# Allegro board PRISON_GOD_SCH_V200.brd
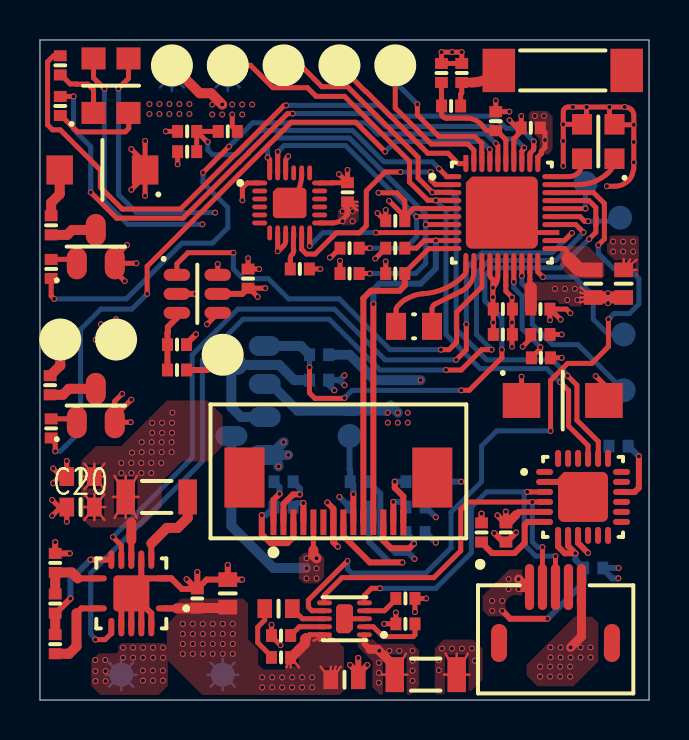
[diagram p0: board, top side]
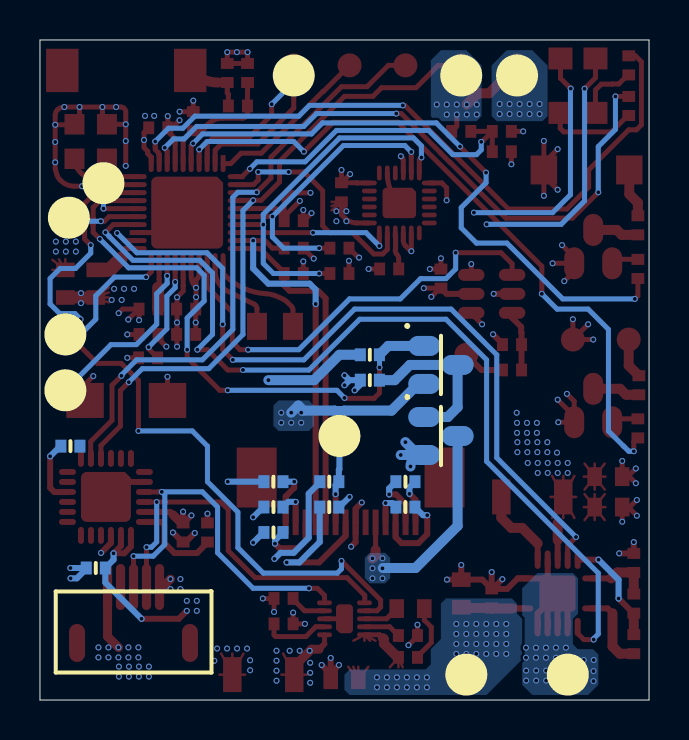
[diagram p1: board, bottom side, seen from below]

Outline 30.48 x 33.02 mm; copper layers: TOP, POWER SOURCE, GND, BOTTOM. Coordinates in mm from the lower left corner of the outline.
Outline path: 0,33.02 30.48,33.02 30.48,0 0,0 0,33.02

## Design rules (mm)
constraint set DEFAULT: min track width 0.127

## Placement (name value [footprint] x y rotation side)
ANT  ANTENNA  [ANT700X200-2N]  26.16 31.5 0 top
BAT+  BAT+  [TESTPOINT120]  9.14 1.27 180 bottom
BAT-  BAT-  [TESTPOINT120]  4.06 1.27 180 bottom
C1  100n  [RESC_0402]  7.37 28.45 0 top
C2  2.2p  [RESC_0402]  20.57 29.72 180 top
C3  100n  [RESC_0402]  24.56 28.63 180 top
C4  1.0u  [RESC_0603]  29.21 20.83 90 top
C5  1.0u  [RESC_0402]  25.04 19.56 180 top
C6  100n  [RESC_0402]  25.04 18.29 0 top
C7  1.0u  [RESC_0402]  23.16 19.56 0 top
C8  100n  [RESC_0402]  23.16 18.29 0 top
C9  100n  [RESC_0402]  17.78 23.98 180 top
C10  0-75p  [RESC_0402]  6.86 17.78 0 top
C11  100n  [RESC_0402]  10.41 21.08 270 top
C12  1u  [RESC_0402]  12.19 10.92 180 bottom
C13  4.7u  [RESC_0402]  18.8 10.92 180 bottom
C14  1u  [RESC_0402]  12.19 9.65 180 bottom
C15  2.2u  [RESC_0402]  18.8 9.65 180 bottom
C16  4.7u  [RESC_0402]  16 9.65 180 bottom
C17  1u  [RESC_0603]  15.24 1.02 0 top
C18  4.7u  [RESC_0603]  9.4 5.33 90 top
C19  0.1u  [RESC_0402]  7.87 5.08 90 top
C20  10u  [RESC_0603]  2.03 9.65 0 top
C21  10u  [RESC_0603]  2.03 11.18 0 top
C22  100n  [RESC_0402]  13 21.56 0 top
C23  10UF  [RESC_1206]  19.3 1.27 180 top
C24  4.7u  [RESC_0402]  28.96 12.7 0 bottom
C25  100n  [RESC_0402]  23.32 8.38 90 top
C26  100n  [RESC_0402]  22.1 8.38 270 top
C27  1.0u  [RESC_0402]  27.69 6.6 180 bottom
C28  100n  [RESC_0402]  15.39 25.4 270 top
CHR_LED  LED  [RESC_0603]  11.94 4.57 180 top
DA_RES  BUTTON  [BUTTON300X400X200-2N]  26.16 14.99 0 top
INTA  INTA  [TESTPOINT120]  29.21 15.49 180 bottom
INTB  INTB  [TESTPOINT120]  29.21 18.29 180 bottom
INTC  INTC  [TESTPOINT120]  17.78 31.75 0 top
INTD  INTD  [TESTPOINT120]  14.99 31.75 0 top
J_GND  GND  [TESTPOINT120]  9.4 31.24 180 bottom
J_VCC  J_VCC  [TESTPOINT120]  6.6 31.24 180 bottom
L1  DNP  [RESC_0402]  21.11 31.37 90 top
L2  7.5n  [RESC_0402]  20.09 31.37 90 top
L3  3.9n  [RESC_0402]  22.81 28.96 90 top
L4  2.2u  [RESC_0603]  27.69 20.83 270 top
L5  4.7u  [RESC_1206]  5.84 10.16 180 top
LED  RED_GREEN  [RGB_COM_A_3528-4N]  3.56 30.73 90 top
PAD  PAD  [TESTPOINT120]  9.14 17.27 0 top
Q1  SI2302DS  [SOT95P237X112-3N]  2.79 22.68 90 top
Q2  SI2302DS  [SOT95P237X112-3N]  2.79 14.73 90 top
Q3  Si2301BDS  [SOT95P237X112-3N]  10.41 13.21 180 bottom
Q4  SI2302DS  [SOT95P237X112-3N]  10.41 16.76 180 bottom
R1  10k  [RESC_0402]  9.4 28.45 0 top
R2  10k  [RESC_0402]  7.37 27.43 0 top
R3  10k  [RESC_0402]  17.78 21.34 180 top
R4  10k  [RESC_0402]  17.78 22.61 180 top
R5  10k  [RESC_0402]  15.49 22.61 0 top
R6  10k  [RESC_0402]  15.49 21.34 0 top
R7  10k  [RESC_0402]  25.07 17.12 0 top
R8  100  [RESC_0402]  0.56 23.75 270 top
R9  100  [RESC_0402]  0.51 15.75 270 top
R10  100  [RESC_0402]  1.02 31.75 90 top
R11  100  [RESC_0402]  1.02 29.72 90 top
R12  100  [RESC_0402]  0.56 21.56 90 top
R13  100  [RESC_0402]  0.56 13.59 90 top
R14  1-10k  [RESC_0402]  6.86 16.51 180 top
R15  47k  [RESC_0402]  13.97 16 180 bottom
R16  47k  [RESC_0402]  13.97 17.27 180 bottom
R17  10k  [RESC_0402]  16 10.92 180 bottom
R18  560k  [RESC_0402]  18.8 8.38 180 bottom
R19  500  [RESC_0402]  18.29 3.81 0 top
R20  250  [RESC_0402]  18.29 5.08 0 top
R21  10k  [RESC_0402]  12.06 3.23 180 top
R22  1.5k  [RESC_0402]  12.06 2.13 0 top
R23  158k  [RESC_0402]  0.76 2.79 90 top
R24  90k  [RESC_0402]  0.76 6.86 90 top
R25  15k  [RESC_0402]  0.76 4.83 90 top
RES  RES  [TESTPOINT120]  15.49 13.21 180 bottom
RXD  RX  [TESTPOINT120]  9.4 31.75 0 top
SOUNDER  R  [DET402_450X300-2N]  3.12 26.52 180 top
SWCLK  SWCLK  [TESTPOINT120]  27.3 25.86 180 bottom
SWDIO  SWDIO  [TESTPOINT120]  29.03 24.13 180 bottom
TXD  TX  [TESTPOINT120]  12.19 31.75 0 top
U1  DA14583_QFN40  [QFN40P500X500X80-41N]  23.11 24.38 0 top
U2  ASC0111B  [SOT95P237X292-6N]  7.87 20.32 0 top
U3  OLED_DIS_64_32  [FPC14N_1280X670X200-16N]  11.68 8.89 180 top
U4  BQ24050  [SON40P200X200X80-11N]  15.24 4.06 180 top
U5  TPS62736_PVQFN14  [QFN14P350X350X80-15N]  4.57 5.33 180 top
U6  MPU9250  [QFN24P300X300X100-25N]  12.5 24.87 0 top
U7  CP2104_QFN24  [QFN24P400X400X80-25N]  27.18 10.16 0 top
U_GND  GND  [TESTPOINT120]  6.6 31.75 0 top
USB  MICRO USB  [MICROUSB]  22.1 0.25 0 top
VM+  VM+  [TESTPOINT120]  3.81 18.03 0 top
VM-  VM-  [TESTPOINT120]  1.02 18.03 0 top
VPP  VPP  [TESTPOINT120]  17.78 31.24 180 bottom
Y1  16MHZ  [OSCCC200X250X90-4N]  27.94 27.94 180 top
Y2  32KHZ  [OSCCC200X120X60-2N]  18.72 18.69 0 top

## Library data of the parts
ANT = ANTENNA_0
BAT+ BAT- INTA INTB INTC INTD J_GND J_VCC PAD RES RXD SWCLK SWDIO TXD U_GND VM+ VM- VPP = TEST POINT
C1-C22 C24-C28 = CAP NP
C23 = CAP
CHR_LED = LED
DA_RES = SW PUSHBUTTON
L1-L5 = INDUCTOR
LED = LED BI-COLOUR_0
Q1 Q2 Q4 = MOSFET_I_EN_GSD: room: motor
Q3 = Si2301BDS_0
R1-R25 SOUNDER = R
U1 = DA14583_QFN40
U2 = ASC0111B_0
U3 = OLED_DIS_64_0
U4 = BQ24050
U5 = TPS62736_PVQFN14_2
U6 = MPU9250_1
U7 = CP2104_QFN24_0
USB = MICROUSB_1
Y1 = CRYSTAL14
Y2 = CRYSTAL

## Footprints (pads in the part's own frame, mm; a bottom-side part is the same pattern mirrored in y, then rotated)
ANT700X200-2N
  rect 1.625x2.17 smd: 1(-3.2,0) 2(3.2,0)
BUTTON300X400X200-2N
  rect 1.875x1.75 smd: 1(-2.062,0) 2(2.062,0)
DET402_450X300-2N
  rect 1.325x1.45 smd: 1(-2.138,0) 2(2.138,0)
FPC14N_1280X670X200-16N
  rect 0.3x1.28 smd: 1(0,0) 2(-0.5,0) 3(-1,0) 4(-1.5,0) 5(-2,0) 6(-2.5,0) 7(-3,0) 8(-3.5,0) 9(-4,0) 10(-4.5,0) 11(-5,0) 12(-5.5,0) 13(-6,0) 14(-6.5,0)
  rect 2x3 smd: M1(-7.95,-2.24) M2(1.45,-2.24)
MICROUSB
  round 0 hole 0.6: (1.7,4.5) (5.7,4.5)
  oval 0.46x2.3 smd: 1(2.4,5.4) 2(3.05,5.4) 3(3.7,5.4) 4(4.35,5.4) 5(5,5.4)
  oval 1.9x0.8 smd rot 89.7: 6(6.525,2.6) 7(0.875,2.6)
OSCCC200X120X60-2N
  rect 1x1.35 smd: 1(-0.9,0) 2(0.9,0)
OSCCC200X250X90-4N
  rect 1x1.025 smd: 1(-0.812,0.863) 2(-0.812,-0.863) 3(0.812,-0.863) 4(0.812,0.863)
QFN14P350X350X80-15N
  oval 0.925x0.3 smd: 1(-1.688,0.75) 7(1.688,0.75) 8(1.688,-0.75) 14(-1.688,-0.75)
  oval 0.3x0.925 smd: 2(-1,1.688) 3(-0.5,1.688) 4(0,1.688) 5(0.5,1.688) 6(1,1.688) 9(1,-1.688) 10(0.5,-1.688) 11(0,-1.688) 12(-0.5,-1.688) 13(-1,-1.688)
  custom 1.8x1.8 smd: 15(0,0)
QFN24P300X300X100-25N
  oval 0.75x0.238 smd: 1(-1.5,1) 2(-1.5,0.6) 3(-1.5,0.2) 4(-1.5,-0.2) 5(-1.5,-0.6) 6(-1.5,-1) 13(1.5,-1) 14(1.5,-0.6) 15(1.5,-0.2) 16(1.5,0.2) 17(1.5,0.6) 18(1.5,1)
  oval 0.238x0.75 smd: 7(-1,-1.5) 8(-0.6,-1.5) 9(-0.2,-1.5) 10(0.2,-1.5) 11(0.6,-1.5) 12(1,-1.5) 19(1,1.5) 20(0.6,1.5) 21(0.2,1.5) 22(-0.2,1.5) 23(-0.6,1.5) 24(-1,1.5)
  custom 1.68x1.52 smd: 25(0,0)
QFN24P400X400X80-25N
  oval 0.85x0.3 smd: 1(-1.925,1.25) 2(-1.925,0.75) 3(-1.925,0.25) 4(-1.925,-0.25) 5(-1.925,-0.75) 6(-1.925,-1.25) 13(1.925,-1.25) 14(1.925,-0.75) 15(1.925,-0.25) 16(1.925,0.25) 17(1.925,0.75) 18(1.925,1.25)
  oval 0.3x0.85 smd: 7(-1.25,-1.925) 8(-0.75,-1.925) 9(-0.25,-1.925) 10(0.25,-1.925) 11(0.75,-1.925) 12(1.25,-1.925) 19(1.25,1.925) 20(0.75,1.925) 21(0.25,1.925) 22(-0.25,1.925) 23(-0.75,1.925) 24(-1.25,1.925)
  custom 2.5x2.5 smd: 25(0,0)
QFN40P500X500X80-41N
  custom 0.85x0.25 smd: 1(-2.45,1.8) 2(-2.45,1.4) 3(-2.45,1) 4(-2.45,0.6) 5(-2.45,0.2) 6(-2.45,-0.2) 7(-2.45,-0.6) 8(-2.45,-1) 9(-2.45,-1.4) 10(-2.45,-1.8) 21(2.45,-1.8) 22(2.45,-1.4) 23(2.45,-1) 24(2.45,-0.6) 25(2.45,-0.2) 26(2.45,0.2) 27(2.45,0.6) 28(2.45,1) 29(2.45,1.4) 30(2.45,1.8)
  custom 0.25x0.85 smd: 11(-1.8,-2.45) 12(-1.4,-2.45) 13(-1,-2.45) 14(-0.6,-2.45) 15(-0.2,-2.45) 16(0.2,-2.45) 17(0.6,-2.45) 18(1,-2.45) 19(1.4,-2.45) 20(1.8,-2.45) 31(1.8,2.45) 32(1.4,2.45) 33(1,2.45) 34(0.6,2.45) 35(0.2,2.45) 36(-0.2,2.45) 37(-0.6,2.45) 38(-1,2.45) 39(-1.4,2.45) 40(-1.8,2.45)
  custom 3.6x3.6 smd: 41(0,0)
RESC_0402
  rect 0.55x0.64 smd: 1(-0.477,0) 2(0.477,0)
RESC_0603
  rect 0.73x0.94 smd: 1(-0.69,0) 2(0.69,0)
RESC_1206
  rect 0.925x1.75 smd: 1(-1.55,0) 2(1.55,0)
RGB_COM_A_3528-4N
  rect 1.1x1.2 smd: 1(-1.363,0.875) 2(-1.363,-0.875) 3(1.363,-0.875) 4(1.363,0.875)
SON40P200X200X80-11N
  oval 0.75x0.24 smd: 1(-1,0.8) 2(-1,0.4) 3(-1,0) 4(-1,-0.4) 5(-1,-0.8) 6(1,-0.8) 7(1,-0.4) 8(1,0) 9(1,0.4) 10(1,0.8)
  custom 0.85x1.45 smd: 11(0,0)
SOT95P237X112-3N
  oval 1.6x1 smd: 1(-0.835,0.95) 2(-0.835,-0.95) 3(0.835,0)
SOT95P237X292-6N
  oval 1.325x0.6 smd: 1(-1.022,0.95) 2(-1.022,0) 3(-1.022,-0.95) 4(1.022,-0.95) 5(1.022,0) 6(1.022,0.95)
TESTPOINT120
  round 1.2 smd: 1(0,0)

## Nets
GND: BAT-.1 C1.1 C3.2 C4.2 C5.1 C6.2 C7.2 C8.2 C9.2 C10.2 C11.1 C13.1 C15.1 C16.2 C17.2 C18.2 C19.2 C20.1 C21.1 C22.2 C23.1 C24.1 C25.1 C26.1 C27.1 C28.1 DA_RES.2 J_GND.1 L1.2 L2.2 L3.2 Q1.2(S) Q2.2(S) Q4.2(S) R1.2 R7.2 R16.1 R18.1 R19.1 R20.2 R21.2 R24.2 U1.16 U1.23 U1.34 U1.41 U2.2 U2.4 U2.6 U3.7(VSS) U4.3(VSS) U4.11 U5.2 U5.3 U5.4 U5.5 U5.12(VSS) U5.14 U5.15 U6.18 U6.20 U6.25 U7.2 U7.25 U_GND.1 USB.5 USB.6 USB.7 Y1.2 Y1.3
VBAT: BAT+.1 C17.1 C18.1 C19.1 J_VCC.1 Q3.2(S) R2.1 R15.1 R22.2 SOUNDER.1 U4.10 U5.1 VM+.1
VBAT_AD: C1.2 R1.1 R2.2 U1.1
VBUS: C23.2 C27.2 U4.1 U7.7 U7.8 USB.1(VBUS)
VCC_3V: C6.1 C7.1 C8.1 C9.1 C11.2 C16.1 C20.2 C21.2 C25.2 C28.2 DA_RES.1 L5.2 LED.3 LED.4 R3.2 R4.2 R5.1 R6.1 R17.1 U1.5 U1.14 U1.15 U2.5(VDD) U3.8 U5.11 U6.1 U6.8(VDDIO) U6.9 U6.13 U6.22 U7.5 U7.9
VIN_OK: U1.22 U5.10
VIN_OK_SET: U1.24 U5.6
CHR_SET: U1.28 U4.7
D+: U4.5 U7.3 USB.3
D-: U4.6 U7.4 USB.2
DA_RST: R7.1 U1.17
I2C_SCL_1: R4.1 U1.9 U3.11
I2C_SCL_2: R5.2 U1.6 U6.23
I2C_SDA_1: R3.1 U1.10 U3.10
I2C_SDA_2: R6.2 U1.7 U6.24
INTA: INTA.1 U1.18
INTB: INTB.1 U1.20
INTC: INTC.1 U1.39
INTD: INTD.1 U1.40
LED1: R10.2 U1.32
LED2: R11.2 U1.33
MOTOR: R13.1 U1.37
MPU_FSYNC: U1.2 U6.11
MPU_INT: U1.8 U6.12
OLED_RES: R17.2 RES.1 U3.9
OLED_VBAT: Q3.3 U3.5
OLED_VBAT_SW: Q4.1 R16.2 U1.27
SOUNDER: R12.1 U1.36
SWCLK: SWCLK.1 U1.26
SWDIO: SWDIO.1 U1.25
TOUCH: U1.13 U2.1
UART_RX: RXD.1 U1.4 U7.21
UART_TX: TXD.1 U1.3 U7.20
VDCDC: C3.1 C4.1 C5.2 L4.2 U1.19 U1.31
VPP: U1.38 VPP.1
N650552: C2.2 L2.1 L3.1 U1.35
N650846: L4.1 U1.21
N657737: U1.11 Y2.1
N657743: U1.12(XTAL32KP) Y2.2
N658494: U1.29 Y1.1
N680797: ANT.1 C2.1 L1.1
N748992: R19.2 U4.2
N749044: R20.1 U4.4
N749072: R21.1 U4.9
N749104: CHR_LED.1(CATHODE) U4.8
N749108: CHR_LED.2 R22.1
N749358: L5.1 U5.13
N749416: R24.1 R25.2 U5.8
N749488: R23.2 R25.1 U5.9
N750591: C22.1 U6.10
N751124: R8.1 SOUNDER.2
N751136: R9.1 VM-.1
N751236: Q1.3 R8.2
N751248: Q2.3 R9.2
N751256: Q1.1 R12.2
N751260: Q2.1 R13.2
N752175: C12.2 U3.1
N752329: Q3.1 Q4.3 R15.2
N752341: C12.1 U3.2
N752385: C14.2 U3.3
N752391: C14.1 U3.4
N752429: R18.2 U3.12
N752435: C15.2 U3.13
N752441: C13.2 U3.14
N753230: LED.1 R10.1
N753234: LED.2(YG_C) R11.1
N753932: C24.2 U7.16(VPP)
N754493: C10.1 R14.2 U2.3
N766501: PAD.1 R14.1
N768010: C26.2 U7.6
N788503: U1.30 Y1.4
N7492626: R23.1 U5.7

Pads without a net: ANT 2; U3 6 M1 M2; U6 2 3 4 5 6 7 14 15 16 17 19 21; U7 1 10 11 12 13 14 15 17 18 19 22 23 24; USB 4

## Via types
v1: diameter 0.3, hole 0.2, TOP to BOTTOM, 370 vias

## Routing (per net, layer and track width the routed paths; a pad name or vN(x,y) marks a point on that pad's centre or on a via; arc(x,y) is an arc through that point)
GND: length 267.8
  TOP w0.127: C23.1 20.85,2.32 ; C23.1 21.49,1.27 ; C23.1 21.41,2.32 ; C23.1 20.3,2.32 ; C23.1 20.21,1.27 ; C4.2 29.53,22.04 ; C4.2 29.86,22.02 ; C4.2 29.21,22.06 ; C4.2 29.86,21.52
  TOP w0.25: v1(17.22,3.81) R19.1 v1(17.81,4.37) ; Q1.2 3.74,22.15 v1(4.36,22.76) ; Q1.2 3.74,21.45 v1(4.24,20.95) ; Q1.2 v1(4.83,21.85) ; v1(28.5,29.67) 28.5,29.41 arc(28.56,29.08) Y1.2 28.81,28.78 v1(29.72,28.78) ; v1(28.5,29.67) v1(29.26,29.67) arc(29.45,29.63) 29.61,29.52 arc(29.69,29.4) 29.72,29.26 v1(29.72,28.78) ; v1(28.5,29.67) v1(27.36,29.67) ; v1(4.54,13.9) Q2.2 3.74,14.2 ; 24.08,28.45 24.05,28.45 v1(23.5,29.01) ; 24.08,28.45 C3.2 v1(24.08,29.21) ; 24.08,28.45 23.71,28.08 23.71,27.83 23.71,27.83 23.71,27.36 23.71,27.36 U1.34 ; C28.1 v1(15.39,26.52) ; C28.1 14.63,25.88 14.62,25.87 U6.18 ; C28.1 v1(14.96,26.31) ; U2.4 8.9,19.34 v1(8.36,18.8) ; v1(26.19,28.8) 26.19,29.42 arc(26.26,29.59) 26.44,29.67 v1(26.67,29.67) v1(27.36,29.67) ; v1(26.19,28.8) Y1.3 arc(27.3,29.06) 27.36,29.35 v1(27.36,29.67) ; v1(26.19,28.8) v1(26.19,27.97) v1(26.19,26.72) ; v1(1.34,8.92) C20.1 1.04,9.65 ; v1(29.72,28.78) v1(29.72,27.91) v1(29.72,26.9) 29.72,26.61 arc(29.72,26.57) 29.71,26.53 29.62,26.24 arc(29.57,26.14) 29.5,26.05 29.44,25.98 arc(29.13,25.78) 28.76,25.7 v1(28.37,25.7) ; U2.6 v1(8.9,21.81) ; v1(25.52,19) C5.1 25.54,19.56 ; U1.41 24.11,23.38 U1.23 ; v1(23.62,17.68) 23.62,18.27 C8.2 23.62,18.31 v1(23.62,18.89) 23.62,19.54 C7.2 23.62,19.58 v1(23.62,20.15) 23.31,20.45 23.31,20.75 23.31,20.75 23.31,21.08 23.31,21.08 23.31,21.22 arc(23.31,21.26) 23.31,21.3 U1.16 ; 3.74,14.2 v1(4.57,15.03) ; 3.74,14.2 3.74,14.95 v1(4.11,15.32) ; v1(26.54,19.35) 26.34,19.56 25.54,19.56 ; v1(10.41,22.1) C11.1 v1(10.97,21.56) ; C1.1 v1(6.3,28.45) ; v1(9.62,29.29) 9.62,28.7 R1.2 9.88,28.49 ; v1(0.66,10.85) 0.99,11.18 1.07,11.18 ; R7.2 v1(26.11,17.12) ; v1(19.33,5.08) R20.2 v1(18.77,4.41) ; 1.04,9.65 v1(0.61,9.22) ; 1.04,9.65 0.97,9.65 v1(0.61,10.01) ; U4.3 U4.11 ; 25.54,19.56 v1(26.06,19.03) ; v1(11.59,3.76) R21.2 11.59,3.2 v1(12.04,2.74) ; 1.07,11.18 C21.1 v1(1.34,11.96) ; 1.07,11.18 v1(0.66,11.58) ; C6.2 v1(26.11,18.29) ; U6.20 13.1,26.32 arc(12.94,25.53) U6.25 ; v1(27.81,16.21) 28.22,15.79 DA_RES.2 ; v1(14.03,21.56) C22.2 ; v1(16.89,24.36) 17.27,23.98 C9.2 v1(17.3,24.52) ; v1(22.81,29.99) L3.2 v1(23.49,29.43) ; v1(20.62,32.41) v1(21.11,32.41) L1.2 L2.2 v1(20.09,32.41) v1(20.62,32.41)
  TOP w0.3: U5.4 U5.15 ; U5.15 5.07,5.83 ; U5.15 4.07,4.83 U5.5 ; U5.15 5.07,4.83 ; C10.2 7.34,17.82 v1(7.81,18.3) ; U5.12 5.07,5.83 ; 5.07,5.83 5.32,6.08 U5.14 6.57,6.08 7.1,5.56 7.83,5.56 ; 7.83,5.56 v1(7.34,6.05) ; 7.83,5.56 C19.2 ; C26.1 v1(22.1,9.32) ; 15.93,1.34 v1(15.93,2.1) ; 15.93,1.34 v1(15.52,1.75) ; 15.93,1.34 15.93,1.3 ; v1(23.83,8.38) 23.35,7.9 C25.1 23.19,7.9 v1(22.73,8.36) ; C17.2 15.93,1.3 ; 15.93,1.3 v1(16.38,1.75) ; C18.2 8.34,6.02 C19.2 ; C18.2 v1(10.11,6.02) ; C18.2 v1(9.4,6.76) ; C19.2 v1(7.87,6.4) ; 5.07,4.83 5.57,4.33 U5.2 ; 5.07,4.83 U5.3 ; v1(0.76,7.9) R24.2 v1(1.49,7.34) ; v1(14.91,7.67) 14.68,7.9 U3.7 14.68,9.57 v1(14.38,9.88) ; U7.25 26.43,10.91 U7.2 ; U2.2 v1(7.77,20.32)
  TOP w0.45: USB.5 27.1,3.18 v1(26.55,2.63)
  TOP w0.5: U_GND.1 8,30.35 8.56,30.35 v1(9.12,29.79)
  GND w0.127: v1(0.66,10.85) 0.99,10.85 ; v1(0.66,10.85) 0.66,10.52 ; v1(0.66,10.85) 0.94,11.13 ; v1(0.66,10.85) 0.33,10.85 ; v1(0.66,10.85) 0.38,11.13 ; v1(0.66,10.85) 0.38,10.56 ; v1(0.66,10.85) 0.66,11.17 ; v1(0.66,10.85) 0.94,10.56 ; v1(28.95,6.09) 29.28,6.09 ; v1(28.95,6.09) 28.95,5.76 ; v1(28.95,6.09) 28.62,6.09 ; v1(28.95,6.09) 29.23,6.37 ; v1(28.95,6.09) 28.67,6.37 ; v1(28.95,6.09) 29.23,5.81 ; v1(28.95,6.09) 28.67,5.81 ; 4.26,13.61 v1(4.54,13.9) ; v1(4.54,13.9) 4.54,13.57 ; v1(4.54,13.9) 4.54,14.22 ; v1(4.54,13.9) 4.83,13.61 ; v1(4.54,13.9) 4.87,13.9 ; v1(4.54,13.9) 4.22,13.9 ; v1(4.54,13.9) 4.26,14.18 ; v1(4.54,13.9) 4.83,14.18 ; 1.34,8.59 v1(1.34,8.92) ; v1(1.34,8.92) 1.34,9.25 ; v1(1.34,8.92) 1.06,8.64 ; v1(1.34,8.92) 1.67,8.92 ; v1(1.34,8.92) 1.01,8.92 ; v1(1.34,8.92) 1.06,9.2 ; v1(1.34,8.92) 1.62,9.2 ; v1(1.34,8.92) 1.62,8.64 ; v1(28.96,6.6) 29.28,6.6 ; v1(28.96,6.6) 28.67,6.89 ; v1(28.96,6.6) 29.24,6.89 ; v1(28.96,6.6) 28.67,6.32 ; v1(28.96,6.6) 28.63,6.6 ; v1(28.96,6.6) 29.24,6.32 ; v1(28.96,6.6) 28.96,6.93 ; 23.54,8.1 v1(23.83,8.38) ; v1(23.83,8.38) 23.83,8.71 ; v1(23.83,8.38) 23.83,8.05 ; v1(23.83,8.38) 23.5,8.38 ; v1(23.83,8.38) 24.11,8.66 ; v1(23.83,8.38) 24.15,8.38 ; v1(23.83,8.38) 23.54,8.66 ; v1(23.83,8.38) 24.11,8.1 ; 7.52,18.01 v1(7.81,18.3) ; v1(7.81,18.3) 8.13,18.3 ; v1(7.81,18.3) 8.09,18.01 ; v1(7.81,18.3) 8.09,18.58 ; v1(7.81,18.3) 7.81,18.62 ; v1(7.81,18.3) 7.48,18.3 ; v1(7.81,18.3) 7.81,17.97 ; v1(7.81,18.3) 7.52,18.58 ; v1(14.99,10.16) 15.27,10.44 ; v1(14.99,10.16) 14.7,10.44 ; v1(14.99,10.16) 15.27,9.88 ; v1(14.99,10.16) 15.31,10.16 ; v1(14.99,10.16) 14.66,10.16 ; v1(14.99,10.16) 14.99,9.83 ; v1(14.99,10.16) 14.7,9.88 ; v1(14.99,10.16) 14.99,10.49 ; v1(14.38,9.88) 14.66,9.6 ; v1(14.38,9.88) 14.66,10.16 ; v1(14.38,9.88) 14.09,10.16 ; v1(14.38,9.88) 14.7,9.88 ; v1(14.38,9.88) 14.05,9.88 ; v1(14.38,9.88) 14.09,9.6 ; v1(14.38,9.88) 14.38,9.55 ; v1(14.38,9.88) 14.38,10.21 ; v1(10.11,6.02) 10.44,6.02 ; v1(10.11,6.02) 10.4,6.31 ; v1(10.11,6.02) 9.79,6.02 ; v1(10.11,6.02) 10.4,5.74 ; v1(10.11,6.02) 10.11,5.7 ; v1(10.11,6.02) 9.83,5.74 ; v1(10.11,6.02) 10.11,6.35 ; v1(10.11,6.02) 9.83,6.31 ; v1(12.04,2.74) 12.32,2.46 ; v1(12.04,2.74) 12.32,3.03 ; v1(12.04,2.74) 11.76,2.46 ; v1(12.04,2.74) 12.04,3.07 ; v1(12.04,2.74) 12.37,2.74 ; v1(12.04,2.74) 11.76,3.03 ; v1(12.04,2.74) 11.71,2.74 ; v1(12.04,2.74) 12.04,2.42 ; v1(19.81,7.87) 20.09,8.16 ; v1(19.81,7.87) 20.09,7.59 ; v1(19.81,7.87) 19.53,7.59 ; v1(19.81,7.87) 19.48,7.87 ; v1(19.81,7.87) 19.81,7.55 ; v1(19.81,7.87) 19.53,8.16 ; v1(19.81,7.87) 19.81,8.2 ; v1(19.81,7.87) 20.14,7.87 ; v1(17.81,4.37) 18.09,4.66 ; v1(17.81,4.37) 17.53,4.09 ; v1(17.81,4.37) 17.81,4.05 ; v1(17.81,4.37) 18.09,4.09 ; v1(17.81,4.37) 18.14,4.37 ; v1(17.81,4.37) 17.53,4.66 ; v1(17.81,4.37) 17.81,4.7 ; v1(17.81,4.37) 17.48,4.37 ; 16.94,3.53 v1(17.22,3.81) ; v1(17.22,3.81) 17.55,3.81 ; v1(17.22,3.81) 17.5,4.09 ; v1(17.22,3.81) 16.89,3.81 ; v1(17.22,3.81) 17.5,3.53 ; v1(17.22,3.81) 17.22,3.48 ; v1(17.22,3.81) 16.94,4.09 ; v1(17.22,3.81) 17.22,4.14 ; v1(7.77,20.32) 8.1,20.32 ; v1(7.77,20.32) 8.06,20.6 ; v1(7.77,20.32) 7.44,20.32 ; v1(7.77,20.32) 7.77,19.99 ; v1(7.77,20.32) 7.77,20.65 ; v1(7.77,20.32) 7.49,20.04 ; v1(7.77,20.32) 8.06,20.04 ; v1(7.77,20.32) 7.49,20.6 ; 18.48,4.69 v1(18.77,4.41) ; v1(18.77,4.41) 19.05,4.69 ; v1(18.77,4.41) 18.44,4.41 ; v1(18.77,4.41) 18.48,4.12 ; v1(18.77,4.41) 18.77,4.74 ; v1(18.77,4.41) 19.09,4.41 ; v1(18.77,4.41) 18.77,4.08 ; v1(18.77,4.41) 19.05,4.12 ; v1(21.08,10.92) 21.36,10.64 ; v1(21.08,10.92) 20.8,11.2 ; v1(21.08,10.92) 21.41,10.92 ; v1(21.08,10.92) 21.36,11.2 ; v1(21.08,10.92) 21.08,10.59 ; v1(21.08,10.92) 21.08,11.25 ; v1(21.08,10.92) 20.8,10.64 ; v1(21.08,10.92) 20.75,10.92 ; 7.01,6.05 v1(7.34,6.05) ; v1(7.34,6.05) 7.62,5.76 ; v1(7.34,6.05) 7.67,6.05 ; v1(7.34,6.05) 7.06,6.33 ; v1(7.34,6.05) 7.34,6.37 ; v1(7.34,6.05) 7.34,5.72 ; v1(7.34,6.05) 7.06,5.76 ; 14.58,7.67 v1(14.91,7.67) ; v1(14.91,7.67) 14.63,7.95 ; v1(14.91,7.67) 15.19,7.95 ; v1(14.91,7.67) 14.63,7.39 ; v1(14.91,7.67) 14.91,8 ; v1(14.91,7.67) 15.24,7.67 ; v1(14.91,7.67) 14.91,7.34 ; v1(14.91,7.67) 15.19,7.39 ; 4.07,22.48 v1(4.36,22.76) ; v1(4.36,22.76) 4.64,23.04 ; v1(4.36,22.76) 4.36,23.09 ; v1(4.36,22.76) 4.36,22.43 ; v1(4.36,22.76) 4.07,23.04 ; v1(4.36,22.76) 4.64,22.48 ; v1(4.36,22.76) 4.68,22.76 ; v1(4.36,22.76) 4.03,22.76 ; v1(4.24,20.95) 4.57,20.95 ; v1(4.24,20.95) 3.96,21.24 ; v1(4.24,20.95) 3.96,20.67 ; v1(4.24,20.95) 4.24,21.28 ; v1(4.24,20.95) 4.52,21.24 ; v1(4.24,20.95) 4.24,20.63 ; v1(4.24,20.95) 3.91,20.95 ; v1(4.24,20.95) 4.52,20.67 ; 19.33,4.75 v1(19.33,5.08) ; v1(19.33,5.08) 19.05,4.8 ; v1(19.33,5.08) 19.61,4.8 ; v1(19.33,5.08) 19.61,5.36 ; v1(19.33,5.08) 19.05,5.36 ; v1(19.33,5.08) 19.66,5.08 ; v1(19.33,5.08) 19.33,5.41 ; v1(19.33,5.08) 19,5.08 ; v1(10.41,22.1) 10.74,22.1 ; v1(10.41,22.1) 10.13,21.82 ; v1(10.41,22.1) 10.09,22.1 ; v1(10.41,22.1) 10.41,21.77 ; v1(10.41,22.1) 10.7,21.82 ; v1(10.41,22.1) 10.13,22.38 ; v1(10.41,22.1) 10.41,22.43 ; v1(10.41,22.1) 10.7,22.38 ; 11.3,4.05 v1(11.59,3.76) ; v1(11.59,3.76) 11.26,3.76 ; v1(11.59,3.76) 11.87,4.05 ; v1(11.59,3.76) 11.87,3.48 ; v1(11.59,3.76) 11.92,3.76 ; v1(11.59,3.76) 11.59,3.44 ; v1(11.59,3.76) 11.59,4.09 ; v1(11.59,3.76) 11.3,3.48 ; 16.72,24 v1(16.89,24.36) ; v1(16.89,24.36) 16.61,24.64 ; v1(16.89,24.36) 16.61,24.08 ; v1(16.89,24.36) 16.56,24.36 ; v1(8.36,18.8) 8.36,19.12 ; v1(8.36,18.8) 8.07,18.51 ; v1(8.36,18.8) 8.64,18.51 ; v1(8.36,18.8) 8.07,19.08 ; v1(8.36,18.8) 8.36,18.47 ; v1(8.36,18.8) 8.03,18.8 ; v1(8.36,18.8) 8.64,19.08 ; v1(8.36,18.8) 8.68,18.8 ; 15.65,2.39 v1(15.93,2.1) ; v1(15.93,2.1) 15.93,2.43 ; v1(15.93,2.1) 16.26,2.1 ; v1(15.93,2.1) 16.21,2.39 ; v1(15.93,2.1) 15.6,2.1 ; v1(15.93,2.1) 15.93,1.78 ; 14.63,26.31 v1(14.96,26.31) ; v1(14.96,26.31) 14.68,26.03 ; v1(14.96,26.31) 14.68,26.59 ; v1(14.96,26.31) 15.24,26.03 ; v1(14.96,26.31) 14.96,25.98 ; v1(14.96,26.31) 14.96,26.64 ; 1.34,11.63 v1(1.34,11.96) ; v1(1.34,11.96) 1.06,11.68 ; v1(1.34,11.96) 1.34,12.29 ; v1(1.34,11.96) 1.06,12.24 ; v1(1.34,11.96) 1.62,11.68 ; v1(1.34,11.96) 1.62,12.24 ; v1(1.34,11.96) 1.01,11.96 ; v1(1.34,11.96) 1.67,11.96 ; v1(10.97,21.56) 11.25,21.84 ; v1(10.97,21.56) 10.69,21.84 ; v1(10.97,21.56) 10.64,21.56 ; v1(10.97,21.56) 10.97,21.89 ; v1(10.97,21.56) 10.69,21.28 ; v1(10.97,21.56) 11.3,21.56 ; v1(10.97,21.56) 11.25,21.28 ; v1(10.97,21.56) 10.97,21.23 ; v1(4.57,15.03) 4.9,15.03 ; v1(4.57,15.03) 4.29,14.74 ; v1(4.57,15.03) 4.57,15.35 ; v1(4.57,15.03) 4.85,15.31 ; v1(4.57,15.03) 4.57,14.7 ; v1(4.57,15.03) 4.24,15.03 ; v1(4.57,15.03) 4.85,14.74 ; 14.03,21.24 v1(14.03,21.56) ; v1(14.03,21.56) 13.75,21.85 ; v1(14.03,21.56) 13.75,21.28 ; v1(14.03,21.56) 14.03,21.89 ; v1(14.03,21.56) 14.32,21.28 ; v1(14.03,21.56) 13.71,21.56 ; v1(14.03,21.56) 14.32,21.85 ; v1(14.03,21.56) 14.36,21.56 ; 9.12,7.04 v1(9.4,6.76) ; v1(9.4,6.76) 9.68,7.04 ; v1(9.4,6.76) 9.73,6.76 ; v1(9.4,6.76) 9.07,6.76 ; v1(9.4,6.76) 9.68,6.47 ; v1(9.4,6.76) 9.12,6.47 ; v1(9.4,6.76) 9.4,6.43 ; v1(9.4,6.76) 9.4,7.08 ; v1(15.39,26.52) 15.68,26.8 ; v1(15.39,26.52) 15.11,26.8 ; v1(15.39,26.52) 15.39,26.85 ; v1(15.39,26.52) 15.39,26.19 ; v1(15.39,26.52) 15.68,26.23 ; v1(15.39,26.52) 15.72,26.52 ; v1(1.49,7.34) 1.82,7.34 ; v1(1.49,7.34) 1.78,7.05 ; v1(1.49,7.34) 1.78,7.62 ; v1(1.49,7.34) 1.49,7.66 ; v1(1.49,7.34) 1.17,7.34 ; v1(1.49,7.34) 1.21,7.05 ; v1(1.49,7.34) 1.49,7.01 ; v1(1.49,7.34) 1.21,7.62 ; v1(0.76,7.9) 1.09,7.9 ; v1(0.76,7.9) 0.76,8.23 ; v1(0.76,7.9) 0.48,7.62 ; v1(0.76,7.9) 0.76,7.57 ; v1(0.76,7.9) 1.04,8.18 ; v1(0.76,7.9) 0.43,7.9 ; v1(0.76,7.9) 1.04,7.62 ; v1(0.76,7.9) 0.48,8.18 ; 3.83,15.6 v1(4.11,15.32) ; v1(4.11,15.32) 4.44,15.32 ; v1(4.11,15.32) 4.11,14.99 ; v1(4.11,15.32) 3.78,15.32 ; v1(4.11,15.32) 3.83,15.03 ; v1(4.11,15.32) 4.11,15.64 ; v1(4.11,15.32) 4.39,15.6 ; v1(15.52,1.75) 15.52,2.08 ; v1(15.52,1.75) 15.52,1.42 ; v1(15.52,1.75) 15.8,1.47 ; v1(15.52,1.75) 15.85,1.75 ; v1(15.52,1.75) 15.24,1.47 ; v1(15.52,1.75) 15.19,1.75 ; v1(15.52,1.75) 15.24,2.04 ; 19.48,9.14 v1(19.81,9.14) ; v1(19.81,9.14) 20.14,9.14 ; v1(19.81,9.14) 19.81,9.47 ; v1(19.81,9.14) 20.09,9.43 ; v1(19.81,9.14) 19.81,8.82 ; v1(19.81,9.14) 19.53,9.43 ; v1(19.81,9.14) 19.53,8.86 ; v1(19.81,9.14) 20.09,8.86 ; 8.61,21.53 v1(8.9,21.81) ; v1(8.9,21.81) 8.9,22.14 ; v1(8.9,21.81) 9.18,22.09 ; v1(8.9,21.81) 9.18,21.53 ; v1(8.9,21.81) 8.61,22.09 ; v1(8.9,21.81) 8.57,21.81 ; v1(8.9,21.81) 9.22,21.81 ; v1(8.9,21.81) 8.9,21.48 ; v1(0.61,10.01) 0.89,9.72 ; v1(0.61,10.01) 0.94,10.01 ; v1(0.61,10.01) 0.33,9.72 ; v1(0.61,10.01) 0.61,10.34 ; v1(0.61,10.01) 0.89,10.29 ; v1(0.61,10.01) 0.61,9.68 ; v1(0.61,10.01) 0.33,10.29 ; 4.54,22.13 v1(4.83,21.85) ; v1(4.83,21.85) 4.54,21.56 ; v1(4.83,21.85) 4.83,22.18 ; v1(4.83,21.85) 4.5,21.85 ; v1(4.83,21.85) 4.83,21.52 ; v1(22.1,9.32) 22.43,9.32 ; v1(22.1,9.32) 22.38,9.6 ; v1(22.1,9.32) 22.1,9.65 ; v1(22.1,9.32) 21.82,9.6 ; v1(22.1,9.32) 22.1,8.99 ; v1(22.1,9.32) 21.82,9.04 ; v1(22.1,9.32) 22.38,9.04 ; v1(22.1,9.32) 21.77,9.32 ; 0.38,11.3 v1(0.66,11.58) ; v1(0.66,11.58) 0.99,11.58 ; v1(0.66,11.58) 0.94,11.3 ; v1(0.66,11.58) 0.66,11.91 ; v1(0.66,11.58) 0.38,11.87 ; v1(0.66,11.58) 0.94,11.87 ; v1(0.66,11.58) 0.33,11.58 ; v1(0.66,11.58) 0.66,11.25 ; v1(0.61,9.22) 0.89,8.94 ; v1(0.61,9.22) 0.61,8.89 ; v1(0.61,9.22) 0.33,9.5 ; v1(0.61,9.22) 0.33,8.94 ; v1(0.61,9.22) 0.94,9.22 ; v1(0.61,9.22) 0.61,9.55 ; v1(0.61,9.22) 0.89,9.5 ; v1(7.87,6.4) 7.87,6.73 ; v1(7.87,6.4) 8.16,6.68 ; v1(7.87,6.4) 7.55,6.4 ; v1(7.87,6.4) 7.87,6.07 ; v1(7.87,6.4) 8.2,6.4 ; v1(7.87,6.4) 8.16,6.12 ; v1(7.87,6.4) 7.59,6.68 ; 22.45,8.07 v1(22.73,8.36) ; v1(22.73,8.36) 22.73,8.03 ; v1(22.73,8.36) 22.45,8.64 ; v1(22.73,8.36) 23.02,8.07 ; v1(22.73,8.36) 22.73,8.68 ; v1(22.73,8.36) 23.02,8.64 ; v1(22.73,8.36) 22.41,8.36 ; v1(22.73,8.36) 23.06,8.36 ; 16.38,1.42 v1(16.38,1.75) ; v1(16.38,1.75) 16.1,1.47 ; v1(16.38,1.75) 16.05,1.75 ; v1(16.38,1.75) 16.38,2.08 ; v1(6.3,28.45) 6.3,28.78 ; v1(6.3,28.45) 5.97,28.45 ; v1(6.3,28.45) 6.02,28.17 ; v1(6.3,28.45) 6.58,28.17 ; v1(6.3,28.45) 6.63,28.45 ; v1(6.3,28.45) 6.58,28.73 ; v1(6.3,28.45) 6.02,28.73 ; v1(6.3,28.45) 6.3,28.12
  BOTTOM w0.127: 9.4,30.46 J_GND.1 ; J_GND.1 8.62,31.24 ; J_GND.1 9.4,32.02 ; J_GND.1 10,31.84 ; J_GND.1 10.18,31.24 ; J_GND.1 8.8,30.64 ; J_GND.1 10,30.64 ; J_GND.1 8.8,31.84 ; BAT-.1 4.84,1.27 ; BAT-.1 3.46,0.67 ; BAT-.1 3.46,1.87 ; BAT-.1 4.66,0.67 ; BAT-.1 3.29,1.27 ; BAT-.1 4.06,2.05 ; BAT-.1 4.06,0.49 ; BAT-.1 4.66,1.87
  BOTTOM w0.3: v1(14.99,10.16) 15.49,9.65 C16.2 ; 28.48,12.65 C24.1 28.48,12.87 ; v1(28.95,6.09) 28.63,6.09 28.16,6.56 C27.1 v1(28.96,6.6) ; v1(19.81,7.87) 19.3,8.38 R18.1 ; C15.1 19.3,9.65 v1(19.81,9.14) ; C13.1 v1(21.08,10.92)
  BOTTOM w0.5: v1(19.05,16) 16.76,16 15.49,17.27 R16.1 ; v1(17.91,14.37) 17.55,14.73 17.29,14.48 15.73,14.48 15.71,14.46 15.28,14.46 15.26,14.48 12.88,14.48 11.55,15.81 Q4.2
  vias: v1(2.77,2) v1(2.78,1.45) v1(2.78,0.95) v1(3.27,2) v1(3.28,1.45) v1(3.28,0.95) v1(4.16,2.62) v1(4.16,2.12) v1(4.66,2.62) v1(4.66,2.12) v1(5.16,2.62) v1(5.16,2.12) v1(5.15,1.47) v1(5.15,0.97) v1(5.66,2.62) v1(5.66,2.12) v1(5.65,1.47) v1(5.65,0.97) v1(6.16,2.62) v1(6.16,2.12) v1(6.15,1.47) v1(6.15,0.97) v1(8.62,29.79) v1(8.62,29.29) v1(9.12,29.29) v1(9.62,29.79) v1(10.12,29.79) v1(10.12,29.29) v1(10.62,29.79) v1(17.41,14.37) v1(17.41,13.87) v1(17.91,13.87) v1(18.41,14.37) v1(18.41,13.87) v1(19.96,1.99) v1(19.96,1.49) v1(20.12,2.58) v1(20.62,2.58) v1(21.12,2.58) v1(21.62,2.58) v1(21.76,1.96) v1(25.03,1.67) v1(25.03,1.17) v1(25.53,1.67) v1(25.53,1.17) v1(25.55,2.63) v1(25.55,2.13) v1(26.03,1.67) v1(26.03,1.17) v1(26.05,2.63) v1(26.05,2.13) v1(26.53,1.67) v1(26.53,1.17) v1(26.55,2.13) v1(27.05,2.63) v1(27.05,2.13) v1(27.55,2.63) v1(27.55,2.13) v1(28.68,22.94) v1(28.68,22.44) v1(29.18,22.94) v1(29.18,22.44) v1(29.68,22.94) v1(29.68,22.44)
VBAT: length 75.9
  TOP w0.127: 14.05,1.66 C17.1 ; C17.1 14.8,1.66 ; C17.1 15.05,1.66 ; C17.1 14.55,1.66 ; R22.2 12.97,2.63 ; R22.2 12.54,1.64 ; R22.2 12.33,1.64 ; R22.2 12.97,1.64 ; 13.96,2.97 U4.10 ; U4.10 14.79,2.97 ; U4.10 13.69,2.97 ; U4.10 14.24,2.97
  TOP w0.25: 5.26,26.22 SOUNDER.1 5.26,26.87 ; 5.26,26.22 v1(5.26,25.23) ; 5.26,26.22 v1(4.57,25.53) ; v1(2.79,18.03) VM+.1 ; VM+.1 v1(3.05,18.8) ; VM+.1 v1(3.81,19.05) ; R2.1 v1(6.89,26.8) ; U4.10 13.49,3.26 13.32,3.1 ; 5.26,26.87 v1(5.26,27.97) ; 5.26,26.87 v1(4.57,27.56)
  TOP w0.3: 6.85,4.58 U5.1
  TOP w0.5: 13.32,3.1 13.27,3.05 13.27,2.83 12.58,2.13 R22.2 ; 6.85,4.58 7.86,4.58 C19.1 9.36,4.6 C18.1
  POWER SOURCE w0.127: v1(15.24,16.24) 15.52,15.96 ; v1(15.24,16.24) 14.91,16.24 ; v1(15.24,16.24) 15.57,16.24 ; v1(15.24,16.24) 14.96,15.96 ; v1(12.43,12.26) 12.75,12.26 ; v1(12.43,12.26) 12.71,11.98 ; v1(12.43,12.26) 12.14,11.98 ; v1(12.43,12.26) 12.14,12.54 ; v1(12.43,12.26) 12.43,11.93 ; v1(12.43,12.26) 12.43,12.59 ; v1(12.43,12.26) 12.71,12.54 ; v1(12.43,12.26) 12.1,12.26 ; v1(3.05,18.8) 3.33,18.51 ; v1(3.05,18.8) 3.38,18.8 ; v1(3.05,18.8) 3.05,18.47 ; v1(3.05,18.8) 2.72,18.8 ; v1(3.05,18.8) 3.33,19.08 ; v1(3.05,18.8) 2.77,18.51 ; v1(3.05,18.8) 3.05,19.12 ; v1(3.05,18.8) 2.77,19.08 ; v1(5.26,27.97) 5.26,28.3 ; v1(5.26,27.97) 5.54,27.69 ; v1(5.26,27.97) 4.98,27.69 ; v1(5.26,27.97) 5.54,28.25 ; v1(5.26,27.97) 4.98,28.25 ; v1(5.26,27.97) 5.26,27.64 ; v1(5.26,27.97) 5.59,27.97 ; v1(5.26,27.97) 4.93,27.97 ; 14.45,15.21 v1(14.73,15.49) ; v1(14.73,15.49) 14.4,15.49 ; v1(14.73,15.49) 14.73,15.17 ; v1(14.73,15.49) 14.73,15.82 ; v1(14.73,15.49) 14.45,15.78 ; v1(5.26,25.23) 5.26,25.55 ; v1(5.26,25.23) 5.26,24.9 ; v1(5.26,25.23) 5.59,25.23 ; v1(5.26,25.23) 4.98,24.94 ; v1(5.26,25.23) 5.54,25.51 ; v1(5.26,25.23) 4.98,25.51 ; v1(5.26,25.23) 4.93,25.23 ; v1(5.26,25.23) 5.54,24.94 ; 4.29,27.84 v1(4.57,27.56) ; v1(4.57,27.56) 4.57,27.89 ; v1(4.57,27.56) 4.85,27.84 ; v1(4.57,27.56) 4.85,27.28 ; v1(4.57,27.56) 4.57,27.23 ; v1(4.57,27.56) 4.9,27.56 ; v1(4.57,27.56) 4.24,27.56 ; v1(4.57,27.56) 4.29,27.28 ; v1(12.19,12.9) 12.19,13.23 ; v1(12.19,12.9) 11.86,12.9 ; v1(12.19,12.9) 12.19,12.57 ; v1(12.19,12.9) 11.91,12.62 ; v1(12.19,12.9) 12.47,13.18 ; v1(12.19,12.9) 11.91,13.18 ; v1(12.19,12.9) 12.47,12.62 ; v1(12.19,12.9) 12.52,12.9 ; v1(6.89,26.8) 7.17,27.08 ; v1(6.89,26.8) 7.22,26.8 ; v1(6.89,26.8) 6.89,27.13 ; v1(6.89,26.8) 6.56,26.8 ; v1(6.89,26.8) 6.61,26.52 ; v1(6.89,26.8) 7.17,26.52 ; v1(6.89,26.8) 6.61,27.08 ; v1(6.89,26.8) 6.89,26.47 ; v1(11.94,11.68) 12.22,11.4 ; v1(11.94,11.68) 12.22,11.97 ; v1(11.94,11.68) 11.94,11.36 ; v1(11.94,11.68) 11.66,11.97 ; v1(11.94,11.68) 11.94,12.01 ; v1(11.94,11.68) 11.61,11.68 ; v1(11.94,11.68) 12.27,11.68 ; v1(11.94,11.68) 11.66,11.4 ; 2.51,17.75 v1(2.79,18.03) ; v1(2.79,18.03) 3.08,18.32 ; v1(2.79,18.03) 3.12,18.03 ; v1(2.79,18.03) 2.51,18.32 ; v1(2.79,18.03) 2.79,18.36 ; v1(2.79,18.03) 2.47,18.03 ; v1(2.79,18.03) 3.08,17.75 ; v1(2.79,18.03) 2.79,17.71 ; v1(4.57,25.53) 4.85,25.24 ; v1(4.57,25.53) 4.9,25.53 ; v1(4.57,25.53) 4.57,25.86 ; v1(4.57,25.53) 4.29,25.81 ; v1(4.57,25.53) 4.29,25.24 ; v1(4.57,25.53) 4.24,25.53 ; v1(4.57,25.53) 4.85,25.81 ; v1(4.57,25.53) 4.57,25.2 ; v1(15.24,15.75) 15.52,16.03 ; v1(15.24,15.75) 14.96,16.03 ; v1(15.24,15.75) 15.52,15.47 ; v1(15.24,15.75) 15.57,15.75 ; v1(3.81,19.05) 3.81,19.38 ; v1(3.81,19.05) 4.14,19.05 ; v1(3.81,19.05) 3.48,19.05 ; v1(3.81,19.05) 4.09,18.77 ; v1(3.81,19.05) 4.09,19.33 ; v1(3.81,19.05) 3.81,18.72 ; v1(3.81,19.05) 3.53,19.33 ; v1(3.81,19.05) 3.53,18.77
  BOTTOM w0.127: 6,30.64 J_VCC.1 ; J_VCC.1 7.2,30.64 ; J_VCC.1 7.2,31.84 ; J_VCC.1 7.38,31.24 ; J_VCC.1 6.6,32.02 ; J_VCC.1 5.83,31.24 ; J_VCC.1 6,31.84 ; J_VCC.1 6.6,30.46 ; BAT+.1 9.92,1.27 ; BAT+.1 9.14,0.49 ; BAT+.1 9.74,1.87 ; BAT+.1 8.37,1.27 ; BAT+.1 9.74,0.67 ; BAT+.1 9.14,2.05 ; BAT+.1 8.54,1.87 ; BAT+.1 8.54,0.67
  BOTTOM w0.3: v1(14.73,15.49) 14.45,15.78 R15.1 15,16 ; 15,16 15,15.99 v1(15.24,15.75) ; 15,16 v1(15.24,16.24)
  BOTTOM w0.5: Q3.2 11.36,12.26 ; 11.36,12.26 11.55,12.26 ; 11.36,12.26 arc(11.77,12.09) v1(11.94,11.68) ; 11.55,12.26 v1(12.43,12.26) ; 11.55,12.26 v1(12.19,12.9)
  vias: v1(5.48,29.82) v1(5.48,29.32) v1(5.98,29.82) v1(5.98,29.32) v1(6.48,29.82) v1(6.48,29.32) v1(6.98,29.82) v1(6.98,29.32) v1(7.15,3.81) v1(7.15,3.31) v1(7.15,2.81) v1(7.15,2.31) v1(7.48,29.82) v1(7.48,29.32) v1(7.65,3.81) v1(7.65,3.31) v1(7.65,2.81) v1(7.65,2.31) v1(8.15,3.81) v1(8.15,3.31) v1(8.15,2.81) v1(8.15,2.31) v1(8.65,3.81) v1(8.65,3.31) v1(8.65,2.81) v1(8.65,2.31) v1(9.15,3.81) v1(9.15,3.31) v1(9.15,2.81) v1(9.15,2.31) v1(9.65,3.81) v1(9.65,3.31) v1(9.65,2.81) v1(9.65,2.31) v1(11.12,1.13) v1(11.12,0.63) v1(11.62,1.13) v1(11.62,0.63) v1(12.12,1.13) v1(12.12,0.63) v1(12.62,1.13) v1(12.62,0.63) v1(13.12,1.13) v1(13.12,0.63) v1(13.62,1.13) v1(13.62,0.63)
VBAT_AD: length 17.1
  TOP w0.25: R2.2 C1.2 ; C1.2 8.37,27.92 v1(8.4,27.92) ; C1.2 R1.1 ; v1(19.97,26.58) 20.36,26.18 U1.1
  BOTTOM w0.25: v1(19.97,26.58) 19.62,26.92 17.21,26.92 15.64,28.5 11.03,28.5 9.82,27.28 8.64,27.28 8.4,27.52 v1(8.4,27.92)
VBUS: length 17.1
  TOP w0.127: 17.11,1.27 C23.2 ; C23.2 18.39,1.27 ; C23.2 18.31,2.32 ; C23.2 17.2,2.32
  TOP w0.25: 16.24,2.81 U4.1
  TOP w0.3: U7.8 26.43,7.71 v1(26.8,7.34) 26.26,7.34 25.93,7.68 U7.7 ; USB.1 24.39,5.55 v1(23.95,5.55) ; v1(23.13,4.46) 23.53,4.06 v1(25.4,4.06) ; 16.51,2.54 16.24,2.81
  TOP w0.45: C23.2 17.75,1.68 16.9,2.54 16.51,2.54 ; v1(23.95,6.05) 24.35,5.65 USB.1
  BOTTOM w0.3: v1(26.8,7.34) 26.8,7.02 C27.2 27.21,5.87 v1(25.4,4.06)
  vias: v1(16.98,2.46) v1(16.96,1.86) v1(16.96,1.36) v1(16.96,0.86) v1(17.48,2.46) v1(17.98,2.46) v1(18.64,2.47) v1(18.64,1.97) v1(18.64,1.47) v1(18.64,0.97) v1(22.63,4.96) v1(22.63,4.46) v1(23.13,4.96) v1(23.45,6.05) v1(23.45,5.55)
VCC_3V: length 91.7
  TOP w0.127: L5.2 4.85,9.11 ; L5.2 4.29,11.21 ; L5.2 3.74,9.11 ; L5.2 3.74,11.21 ; L5.2 4.85,11.21 ; L5.2 4.29,9.11 ; L5.2 4.93,10.16 ; L5.2 3.65,10.16 ; C20.2 3.23,10.3 ; C20.2 2.18,9.65 ; C20.2 2.72,9 ; C20.2 3.27,9.65 ; C20.2 3.23,9 ; C20.2 2.22,9 ; C20.2 2.22,10.3 ; C20.2 2.72,10.3 ; C21.2 3.23,10.53 ; C21.2 2.18,11.18 ; C21.2 2.72,11.82 ; C21.2 2.22,10.53 ; C21.2 3.23,11.82 ; C21.2 2.22,11.82 ; C21.2 2.72,10.53 ; C21.2 3.27,11.18 ; C28.2 15.89,24.71 ; C28.2 15.89,24.49 ; C28.2 15.89,24.92 ; C28.2 15.14,24.48
  TOP w0.25: C8.1 v1(22.69,18.89) C7.1 22.67,19.58 v1(22.67,20.16) v1(22.67,20.63) ; U1.14 22.51,21.29 arc(22.53,21.19) 22.59,21.11 22.67,21.03 v1(22.67,20.63) ; U6.13 14.62,23.87 arc(14.95,23.93) 15.23,24.12 15.39,24.28 C28.2 ; 18.26,24.26 18.26,24.17 ; 18.26,24.26 18.26,24.97 17.86,25.37 v1(16.94,25.37) ; 18.26,24.26 18.18,24.26 v1(17.48,24.97) ; 18.26,24.17 18.68,24.59 19.22,24.59 19.22,24.59 19.98,24.59 19.99,24.58 U1.5 ; 18.26,24.17 C9.1 ; v1(14.51,22.13) 14.54,22.13 R5.1 ; R3.2 v1(17.3,21.94) ; v1(3.92,30.59) 4.43,31.1 LED.3 ; v1(22.67,20.63) arc(22.85,20.9) 22.91,21.22 U1.15 ; v1(3.23,30.58) 2.68,31.13 LED.4 ; v1(12.42,27.2) 12.36,27.14 arc(12.31,27.07) 12.3,26.99 U6.22 ; 10.46,20.6 v1(10.9,20.17) ; 10.46,20.6 C11.2 ; 10.46,20.6 v1(11.27,20.6) ; U6.1 10.37,25.87 10.13,25.63 v1(10.13,25) ; v1(24.16,17.68) 24.57,18.09 C6.1 ; R6.1 v1(15.02,21.97) ; U6.9 12.3,22.98 arc(12.27,22.84) 12.19,22.73 11.94,22.47 v1(11.9,22.45) U6.8 ; DA_RES.1 v1(24.1,16.17) ; R4.2 v1(16.78,22.08)
  TOP w0.3: U3.8 15.18,8.21 16.51,6.88 v1(18.14,6.88) ; v1(22.9,9.24) 23.14,9 23.18,9 C25.2 v1(23.32,9.42) ; U7.9 26.93,7.86 v1(27.43,7.36) ; U2.5 10.13,20.32 C11.2 ; 4.57,8 U5.11 ; U7.5 23.96,9.41 23.83,9.27
  TOP w0.45: 23.83,9.27 23.41,8.86 C25.2
  TOP w0.5: 4.57,8.86 4.57,8
  BOTTOM w0.25: v1(3.23,30.58) 3.23,24.97 4.4,23.8 v1(8.13,23.8) ; v1(3.92,30.59) 3.93,30.58 3.93,25.28 4.83,24.38 v1(8.76,24.38)
  BOTTOM w0.3: v1(18.75,7.06) 18.44,7.37 17.78,7.37 17.03,8.11 17.03,10.32 16.48,10.88 R17.1 ; v1(18.14,6.88) 17.5,6.88 16.48,7.9 C16.1
  vias: v1(4.07,11.86) v1(4.07,11.36) v1(4.61,12.38) v1(4.57,11.86) v1(4.57,11.36) v1(5.09,12.9) v1(5.09,12.4) v1(5.07,11.86) v1(5.07,11.36) v1(5.61,13.87) v1(5.61,13.37) v1(5.59,12.9) v1(5.59,12.4) v1(5.57,11.86) v1(5.57,11.36) v1(6.11,13.87) v1(6.11,13.37) v1(6.09,12.9) v1(6.09,12.4) v1(6.07,11.86) v1(6.62,14.37) v1(6.61,13.87) v1(6.61,13.37) v1(6.59,12.9) v1(6.59,12.4) v1(15.15,24.45) v1(15.15,23.95) v1(15.65,24.45) v1(15.65,23.95)
VIN_OK: length 39.3
  TOP w0.25: U5.10 4.07,7.74 v1(3.65,8.15) ; U1.22 26.24,22.98 v1(26.62,23.36) ; v1(21.34,18.8) 21.34,17.53 v1(20.83,17.02)
  BOTTOM w0.25: v1(3.65,8.15) 7.62,12.12 7.62,17.27 9.91,19.56 14.73,19.56 17.27,17.02 v1(20.83,17.02) ; v1(21.34,18.8) 21.34,21.59 22.12,22.37 25.63,22.37 v1(26.62,23.36)
VIN_OK_SET: length 46.6
  TOP w0.25: v1(2.77,3.02) 3.26,3.02 3.57,3.33 U5.6 ; U1.24 26.81,23.78 v1(27.2,23.39) ; v1(22.61,17.53) 22.1,17.53 21.08,16.51 v1(20.32,16.51)
  BOTTOM w0.25: v1(20.32,16.51) 17.02,16.51 14.48,19.05 10.16,19.05 8.13,17.02 8.13,11.94 2.54,6.35 2.54,3.3 2.77,3.07 v1(2.77,3.02) ; v1(22.61,17.53) 21.84,18.29 21.84,21.36 22.48,22 25.82,22 27.02,23.2 27.02,23.21 v1(27.2,23.39)
CHR_SET: length 38.4
  TOP w0.25: v1(25.55,13.46) 25.55,15.99 26.41,16.84 27.61,16.84 28.45,17.68 v1(28.45,19.05) ; v1(27.94,22.76) 28.24,23.06 28.24,24.84 27.7,25.38 U1.28 ; v1(15.39,6.96) 13.43,5 13.43,4.65 13.61,4.46 U4.7
  BOTTOM w0.25: v1(25.55,13.46) 22.86,13.46 22.1,12.7 22.1,10.92 20.57,9.4 20.57,7.62 19.3,6.35 15.6,6.35 15.39,6.56 v1(15.39,6.96) ; v1(28.45,19.05) 28.73,19.33 29.49,19.33 29.97,19.81 29.97,21.09 29.47,21.59 28.7,21.59 27.94,22.35 v1(27.94,22.76)
D+: length 18.9
  TOP w0.25: U7.3 24.58,10.41 24.57,10.41 v1(24.38,10.41) ; U4.5 16.24,5.24 16.59,5.59 v1(17.02,5.59) ; USB.3 v1(25.8,7.2)
  BOTTOM w0.25: v1(25.8,7.2) 24.82,7.2 24.24,7.78 24.24,9.91 24.23,9.91 24.23,10.26 v1(24.38,10.41) 22.35,10.41 21.59,9.65 21.59,7.37 19.81,5.59 v1(17.02,5.59)
D-: length 19.2
  TOP w0.25: U4.6 14.23,4.88 14.23,5.24 15.11,6.12 19.71,6.12 21.06,7.47 21.06,9.53 21.44,9.91 v1(24.64,9.91) 25.25,9.91 U7.4 ; USB.2 v1(25.15,7.65)
  BOTTOM w0.25: v1(25.15,7.65) 24.9,7.65 24.64,7.91 v1(24.64,9.91)
DA_RST: length 5.6
  TOP w0.25: U1.17 23.71,21.39 23.71,21.39 23.71,21.05 23.71,21.05 v1(23.71,20.91) ; R7.1 25.04,17.57 v1(25.04,17.65)
  BOTTOM w0.25: v1(23.71,20.91) 23.71,20.62 24.13,20.21 24.13,18.57 v1(25.04,17.65)
I2C_SCL_1: length 19.2
  TOP w0.25: U1.9 19.22,22.98 18.85,22.61 R4.1
  TOP w0.3: v1(19.81,22.99) 19.81,22.98 ; U3.11 v1(16.68,19.81)
  BOTTOM w0.3: v1(16.68,19.81) 16.68,20.53 16.98,20.83 19.05,20.83 19.81,21.59 v1(19.81,22.99)
I2C_SCL_2: length 15.6
  TOP w0.25: v1(18.85,24.19) 19.72,24.19 19.73,24.18 U1.6 ; v1(11.9,27.42) 11.9,27.17 11.9,27.17 U6.23 ; v1(16.51,22.61) R5.2
  BOTTOM w0.25: v1(16.51,22.61) 18.29,22.61 18.85,23.16 v1(18.85,24.19) 15.29,27.74 12.22,27.74 v1(11.9,27.42)
I2C_SDA_1: length 17.1
  TOP w0.25: U1.10 19.98,22.58 19.98,22.58 19.46,22.58 18.26,21.38 R3.1
  TOP w0.3: U3.10 16.18,20.1 16.56,20.47 17.99,20.47 18.26,20.74 R3.1
I2C_SDA_2: length 18.4
  TOP w0.25: U6.24 11.5,27.04 v1(11.39,27.14) ; v1(16.51,21.34) R6.2 ; U1.7 v1(19.3,23.78)
  BOTTOM w0.25: v1(11.39,27.14) 11.39,27.72 11.79,28.12 15.48,28.12 19.3,24.3 v1(19.3,23.78) 19.3,21.84 18.8,21.34 v1(16.51,21.34)
INTA: length 9.3
  TOP w0.25: U1.18 v1(24.11,21.22)
  BOTTOM w0.25: v1(24.11,21.22) 24.12,21.22 24.12,20.84 24.64,20.32 24.64,18.8 25.65,17.78 26.92,17.78 INTA.1
INTB: length 6.8
  TOP w0.25: v1(25.17,21.16) 24.91,21.42 U1.20
  BOTTOM w0.25: INTB.1 28.45,18.29 27.69,19.05 27.69,20.22 26.75,21.16 v1(25.17,21.16)
INTC: length 7.6
  TOP w0.25: INTC.1 17.78,29.62 19.58,27.81 21.41,27.81 21.71,27.51 U1.39
INTD: length 8.4
  TOP w0.25: INTD.1 16.28,30.45 16.31,30.45 19.41,27.36 20.42,27.36 20.94,26.83 U1.40
LED1: length 34.6
  TOP w0.25: R10.2 0.68,32.23 0.38,31.93 0.38,28.77 0.63,28.52 1.02,28.52 3.02,26.52 3.02,25.65 4.11,24.56 7.04,24.56 12.22,29.75 v1(12.32,29.75) ; U1.32 24.51,27.29 24.54,27.32 24.54,27.36 24.71,27.54 24.71,27.67 24.71,27.68 v1(24.71,27.94)
  BOTTOM w0.25: v1(24.71,27.94) 24.05,28.6 23.33,28.6 22.72,29.21 17.53,29.21 16.99,29.75 v1(12.32,29.75)
LED2: length 31.8
  TOP w0.25: v1(12.65,29.34) 12.4,29.34 10.43,27.37 10.43,27.36 9.97,26.91 9.97,26.91 7.16,24.1 3.84,24.1 v1(2.54,25.4) ; v1(24.24,27.63) 24.24,27.59 24.16,27.52 24.16,27.51 24.11,27.46 U1.33 ; R11.2 v1(1.68,30.2)
  BOTTOM w0.25: v1(2.54,25.4) 2.54,27.69 1.68,28.54 v1(1.68,30.2) ; v1(12.65,29.34) 16.64,29.34 17.28,28.69 22.64,28.69 23.26,28.07 23.79,28.07 v1(24.24,27.63)
MOTOR: length 34.8
  TOP w0.25: v1(17.27,27.43) 15.8,28.91 12.57,28.91 5.36,21.7 v1(5.36,20.32) ; R13.1 0.76,12.91 v1(0.76,12.45) ; U1.37 22.51,27.54 v1(22.51,27.54)
  BOTTOM w0.25: v1(0.76,12.45) 1.02,12.45 1.27,12.7 1.27,12.7 2.03,13.46 2.03,18.54 3.05,19.56 4.6,19.56 v1(5.36,20.32) ; v1(22.51,27.54) 22.11,27.94 17.78,27.94 v1(17.27,27.43)
MPU_FSYNC: length 11.7
  TOP w0.25: U1.2 19.79,25.78 19.56,26.01 v1(19.56,26.42) ; U6.11 13.1,23.08 13.09,23.08 13.09,22.55 13.33,22.31 13.77,22.31 14.64,23.18 14.64,23.18 14.83,23.37 15.98,23.37 16.33,23.72 16.33,25.48 17.27,26.42 v1(18.03,26.42)
  BOTTOM w0.25: v1(19.56,26.42) v1(18.03,26.42)
MPU_INT: length 8.1
  TOP w0.25: v1(16.81,23.38) 19.47,23.38 19.48,23.39 19.98,23.39 19.98,23.38 U1.8 ; v1(13.5,22.71) U6.12
  BOTTOM w0.25: v1(16.81,23.38) 14.16,23.38 v1(13.5,22.71)
OLED_RES: length 4.4
  TOP w0.3: U3.9 v1(15.68,10.3)
  BOTTOM w0.3: v1(15.68,10.3) 15.68,10.76 R17.2 15.52,11.52 15.49,11.55 RES.1
OLED_VBAT: length 11
  TOP w0.25: 13.68,7.5 U3.5
  TOP w0.5: v1(13.84,7.09) 13.68,7.25 13.68,7.5
  BOTTOM w0.25: v1(13.34,6.59) 13.32,6.6
  BOTTOM w0.5: Q3.3 9.58,8.71 11.68,6.6 13.32,6.6
  vias: v1(13.34,7.09) v1(13.34,6.09) v1(13.84,6.59) v1(13.84,6.09)
OLED_VBAT_SW: length 29.5
  TOP w0.25: v1(27.48,23.06) 27.82,23.4 27.82,23.77 27.83,23.79 27.83,24.12 27.82,24.14 27.82,24.64 27.47,24.99 27.14,24.99 27.13,24.98 U1.27 ; v1(21.08,15.49) 21.48,15.49 23.11,17.12 v1(23.11,17.53) ; v1(15.24,15.11) 15.22,15.09 13.76,15.09 13.49,15.36 v1(13.49,16.64)
  BOTTOM w0.25: v1(13.49,16.64) 13.49,17.27 R16.2 ; v1(15.24,15.11) 15.62,15.49 v1(21.08,15.49) ; v1(27.48,23.06) 26.04,21.62 22.64,21.62 22.27,21.25 22.27,19.96 23.11,19.11 v1(23.11,17.53)
  BOTTOM w0.5: R16.2 13.05,17.71 Q4.1
SOUNDER: length 31.7
  TOP w0.25: v1(0.71,20.07) 0.56,20.22 R12.1 ; U1.36 22.91,27.73 22.82,27.83 v1(22.82,27.84) ; v1(9.46,27.69) v1(8.16,26.39)
  BOTTOM w0.25: v1(9.46,27.69) 10.65,28.87 16.34,28.87 16.89,28.32 22.34,28.32 v1(22.82,27.84) ; v1(8.16,26.39) 8.16,25.88 9.4,24.64 9.4,23.62 8.64,22.86 7.11,22.86 4.32,20.07 v1(0.71,20.07)
SWCLK: length 3
  TOP w0.25: U1.26 v1(27.3,24.58)
  BOTTOM w0.25: SWCLK.1 27.3,25.01 27.3,25 v1(27.3,24.58)
SWDIO: length 3.6
  TOP w0.25: U1.25 27.02,24.18 27.25,23.95 v1(27.43,23.95)
  BOTTOM w0.25: SWDIO.1 28.85,23.95 v1(27.43,23.95)
TOUCH: length 22
  TOP w0.25: v1(9.68,22.38) 7.41,22.38 6.85,21.82 U2.1 ; v1(20.07,17.53) 20.47,17.53 20.85,17.91 20.85,19.41 22.11,20.67 U1.13
  BOTTOM w0.25: v1(20.07,17.53) 17.53,17.53 14.99,20.07 12.45,20.07 11.43,21.08 10.16,21.08 9.68,21.56 v1(9.68,22.38)
UART_RX: length 32.7
  TOP w0.25: U1.4 20.65,25 v1(19.81,25) 19.41,25 18.49,25.92 18.49,26.95 15.24,30.2 13.82,30.2 13.39,30.63 11.66,30.63 10.54,31.75 RXD.1 ; v1(26.04,15.9) 26.45,15.48 26.45,13.7 27.43,12.73 U7.21
  BOTTOM w0.25: v1(19.81,25) 20.32,24.49 20.32,18.29 22.03,16.58 25.36,16.58 v1(26.04,15.9)
UART_TX: length 31
  TOP w0.25: U7.20 27.94,12.1 27.94,12.93 26.87,14 26.87,15.75 v1(26.4,16.22) ; U1.3 20.65,25.4 v1(19.63,25.4) 18.92,26.11 18.92,27.15 15.39,30.68 14.11,30.68 13.04,31.75 TXD.1
  BOTTOM w0.25: v1(26.4,16.22) 26.4,16.26 25.64,17.02 22.35,17.02 20.83,18.54 20.83,25.15 20.57,25.4 v1(19.63,25.4)
VDCDC: length 8.7
  TOP w0.127: 27.04,19.89 L4.2 ; L4.2 27.04,20.64 ; L4.2 27.04,20.14 ; L4.2 27.04,20.39
  TOP w0.25: 24.51,20.73 24.51,21.05 24.52,21.05 24.52,21.39 24.51,21.39 U1.19 ; C3.1 25.27,28.39 v1(25.27,28.02) 25.27,27.64 25.09,27.45 25.09,27.33 24.91,27.16 U1.31
  TOP w0.6: C4.1 L4.2 ; C5.2 24.57,20.63
  vias: v1(24.77,29.22) v1(25.22,29.22) v1(25.77,20.57) v1(26.27,20.57) v1(26.39,20.01) v1(26.77,20.57) v1(26.89,20.01) v1(28.43,20.35) v1(28.43,19.85)
VPP: length 7.3
  TOP w0.25: v1(18.88,29.81) 18.88,29.27 19.96,28.19 21.76,28.19 22.11,27.84 22.11,27.38 22.11,27.37 U1.38
  BOTTOM w0.25: v1(18.88,29.81) 17.78,30.91 VPP.1
N650552: length 6.5
  TOP w0.25: L2.1 20.09,30.36 20.1,30.36 C2.2 20.1,29.36 arc(20.17,29.18) 20.35,29.11 21.34,29.11 arc(21.74,29.03) 22.08,28.8 arc(22.16,28.71) 22.23,28.6 arc(22.32,28.51) 22.45,28.48 L3.1 22.87,28.48 23.31,28.03 U1.35
N650846: length 2.7
  TOP w0.25: U1.21 26.24,22.58 26.36,22.47 26.36,22.29 arc(26.38,22.16) 26.45,22.06
  TOP w0.7: 26.45,22.06 26.9,21.61 arc(27.01,21.54) 27.13,21.52 L4.1
N657737: length 5.5
  TOP w0.25: U1.11 21.31,21.48 arc(21.29,21.35) 21.22,21.24 arc(20.28,20.59) 19.17,20.32 arc(18.94,20.29) 18.72,20.23 arc(18.51,20.15) 18.3,20.05 arc(18.2,19.98) 18.1,19.9 17.89,19.69 arc(17.84,19.61) 17.82,19.52 Y2.1
N657743: length 4.4
  TOP w0.25: Y2.2 19.62,19.58 arc(19.66,19.71) 19.76,19.8 21.09,20.46 arc(21.54,20.87) 21.71,21.46 U1.12
N658494: length 3.8
  TOP w0.25: U1.29 26.95,25.78 arc(27.7,25.92) 28.36,26.31 28.43,26.37 arc(28.67,26.69) Y1.1
N680797: length 3.2
  TOP w0.25: 21.56,30.89 L1.1 21.11,30.36 21.05,30.31 C2.1
  TOP w0.5: ANT.1 22.92,31.45 arc(22.3,31.04) 21.56,30.89
N748992: length 3.3
  TOP w0.25: R19.2 18.77,3.26 18.68,3.17 17.17,3.17 16.68,3.66 U4.2
N749044: length 1.9
  TOP w0.25: U4.4 17.24,4.46 17.81,5.04 R20.1
N749072: length 1.9
  TOP w0.25: U4.9 12.98,3.66 R21.1
N749104: length 1.8
  TOP w0.25: CHR_LED.1 13.14,4.06 U4.8
N749108: length 2.9
  TOP w0.25: CHR_LED.2 11.25,4 10.9,3.65 10.9,2.87 11.59,2.18 R22.1
N749358: length 4.2
  TOP w0.3: 5.57,7.83 U5.13
  TOP w0.5: L5.1 7.39,9.11 6.89,8.61 6.35,8.61 5.57,7.83
N749416: length 3.3
  TOP w0.3: 1.89,6.08 U5.8
  TOP w0.5: R25.2 R24.1 1.6,6.38 1.89,6.08
N749488: length 5.5
  TOP w0.3: R25.1 0.79,4.35 1.52,5.08 v1(1.52,5.08) ; U5.9 v1(2.53,7.02)
  TOP w0.5: R23.2 R25.1
  BOTTOM w0.3: v1(1.52,5.08) 1.52,6.02 v1(2.53,7.02)
N750591: length 1.9
  TOP w0.25: U6.10 12.7,23.2 12.68,23.18 12.68,22.54 12.7,22.52 12.7,22.48 arc(12.68,22.38) 12.62,22.3 arc(12.55,22.19) 12.53,22.07 C22.1
N751124: length 2.5
  TOP w0.5: R8.1 0.56,24.88 0.99,25.31 SOUNDER.2
N751136: length 2
  TOP w0.5: R9.1 1.02,16.73 VM-.1
N751236: length 2.3
  TOP w0.5: R8.2 1.37,23.27 1.61,23.52 Q1.3
N751248: length 2.4
  TOP w0.5: Q2.3 2.79,15.57 1.45,15.57 1.15,15.27 R9.2
N751256: length 1.4
  TOP w0.25: R12.2 0.56,22.05 1.64,22.05 Q1.1
N751260: length 1.4
  TOP w0.25: R13.2 1.67,14.07 Q2.1
  TOP w0.3: 1.84,13.88 Q2.1
N752175: length 2.3
  TOP w0.3: U3.1 11.68,10.01 11.98,10.31 v1(11.99,10.31)
  BOTTOM w0.3: C12.2 11.99,10.65 v1(11.99,10.31)
N752329: length 8.2
  BOTTOM w0.5: Q3.1 10.07,14.16 9.58,14.65 Q4.3 11.97,16.76 12.73,16 R15.2
N752341: length 2.7
  TOP w0.3: v1(13,10.29) 12.66,10.29 12.18,9.81 U3.2
  BOTTOM w0.3: C12.1 13,10.59 v1(13,10.29)
N752385: length 4.4
  TOP w0.3: U3.3 12.68,8.15 12.38,7.85 11.54,7.85 11.1,8.29 v1(11.1,9.25)
  BOTTOM w0.3: v1(11.1,9.25) 11.31,9.25 C14.2
N752391: length 1.6
  TOP w0.3: U3.4 v1(13.18,9.85)
  BOTTOM w0.3: v1(13.18,9.85) 12.87,9.85 C14.1
N752429: length 3.4
  TOP w0.3: U3.12 17.18,7.97 17.56,7.59 18.49,7.59 v1(18.72,7.82)
  BOTTOM w0.3: v1(18.72,7.82) 18.72,7.98 R18.2
N752435: length 1.8
  TOP w0.3: U3.13 v1(17.68,9.91)
  BOTTOM w0.3: v1(17.68,9.91) 18.06,9.91 C15.2
N752441: length 2.8
  TOP w0.3: v1(17.75,10.92) 17.75,10.62 18.18,10.19 U3.14
  BOTTOM w0.3: v1(17.75,10.92) C13.2
N753230: length 3.1
  TOP w0.25: R10.1 1.06,31.27 1.51,30.82 1.82,30.82 1.83,30.81 2.39,30.81 2.68,30.52 LED.1
N753234: length 4.6
  TOP w0.25: R11.1 1.06,29.24 1.88,28.42 4.27,28.42 4.44,28.6 4.44,29.36 LED.2
N753932: length 3.3
  TOP w0.3: v1(29.97,12.19) 29.97,10.62 29.76,10.4 29.11,10.4 U7.16
  BOTTOM w0.3: v1(29.97,12.19) 29.46,12.7 C24.2
N754493: length 3.1
  TOP w0.3: R14.2 C10.1 6.38,18.38 6.4,18.4 6.4,18.67 6.85,19.12 U2.3
N766501: length 2.1
  TOP w0.3: PAD.1 8.38,16.51 R14.1
N768010: length 4.6
  TOP w0.3: C26.2 22.1,7.87 22.62,7.35 23.75,7.35 24.26,7.86 24.26,8.76 24.4,8.91 U7.6
N788503: length 2.2
  TOP w0.25: Y1.4 27.13,26.84 arc(26.94,26.38) 26.47,26.18 U1.30
N7492626: length 4
  TOP w0.3: U5.7 2.07,4.58 1.83,4.34
  TOP w0.5: 1.83,4.34 1.83,2.69 1.46,2.32 R23.1

## Copper pours and planes (outline as drawn; the poured copper is in the pictures)
GND on TOP: 28.73,21.18 28.73,22.02 28.37,22.38 28.37,23.04 28.57,23.24 29.87,23.24 29.97,23.14 29.97,21.23 29.84,21.11 28.8,21.11
GND on TOP: 26.75,4.17 27.64,4.17 27.94,3.86 27.94,1.93 26.7,0.69 24.89,0.69 24.36,1.22 24.36,1.78
GND on TOP: 3.94,2.72 3.94,2.46 3.81,2.34 2.95,2.34 2.57,1.96 2.57,0.71 3.02,0.25 5.94,0.25 6.4,0.71 6.4,2.67 6.22,2.84 4.06,2.84
GND on TOP: 21.69,3.02 20.19,3.02 19.76,2.59 19.76,0.38 19.86,0.28 21.41,0.28 22.15,1.02 22.15,2.57
GND on BOTTOM: 18.54,14.99 17.02,14.99 16.76,14.73 16.76,13.72 17.02,13.46 18.54,13.46 18.8,13.72 18.8,14.73
GND on BOTTOM: 3.81,2.79 3.56,2.54 2.79,2.54 2.54,2.29 2.54,0.76 3.05,0.25 5.84,0.25 6.35,0.76 6.35,5.59 5.59,6.35 3.81,6.35 3.56,6.1 3.56,4.32 3.81,4.06
GND on BOTTOM: 9.14,32.51 8.38,31.75 8.38,29.21 8.64,28.96 10.67,28.96 10.92,29.21 10.92,32 10.41,32.51
GND on GND: 19.26,28.96 12.7,28.96 7.11,23.37 7.11,12.19 3.05,8.13 3.05,5.59 3.3,5.33 4.32,5.33 9.91,10.92 9.91,17.53 13.21,20.83 19.3,20.83 19.81,21.34 19.81,28.49
GND on GND: 10.67,30.23 5.59,30.23 4.32,31.5 4.32,32.51 4.06,32.77 0.76,32.77 0.25,32.26 0.25,6.86 3.05,4.06 4.06,4.06 5.84,5.84 5.84,8.38 5.71,8.64 3.56,8.64 3.05,9.14 3.05,11.43 5.08,13.46 5.08,24.38 5.84,25.15 6.86,25.15 10.92,29.21 10.92,29.97
GND on GND: 16.76,27.43 16.76,17.78 18.8,15.75 21.59,15.75 23.11,14.22 29.84,14.22 30.23,14.73 30.23,29.72 29.72,30.23 22.1,30.23 21.84,30.48 21.84,32.51 21.59,32.77 19.81,32.77 19.3,32.26 19.3,29.97
GND on GND: 16.76,12.95 16.76,14.73 17.02,14.99 19.81,14.99 20.32,14.48 20.32,13.72 20.57,13.46 29.21,13.46 29.97,12.7 29.97,1.27 28.96,0.25 2.03,0.25 1.02,1.27 1.02,6.1 3.81,8.89 7.87,8.89 8.13,8.64 12.45,8.64
VBAT on TOP: 14.45,3.38 15.21,2.62 15.21,0.79 14.68,0.25 12.5,0.25 12.29,0.46 12.29,2.18 13.03,2.92 13.03,3.05 13.08,3.2 13.21,3.33 13.39,3.33 13.44,3.38
VBAT on TOP: 7.06,5.08 6.83,4.85 6.83,4.27 6.35,3.78 6.35,2.03 8.13,0.25 14.99,0.25 15.24,0.51 15.24,1.27 14.99,1.52 11.18,1.52 10.92,1.78 10.92,2.54 10.41,3.05 10.41,4.83 10.16,5.08
VBAT on BOTTOM: 6.86,5.08 6.6,4.83 6.6,4.32 6.35,4.06 6.35,2.03 8.13,0.25 14.99,0.25 15.24,0.51 15.24,1.27 14.99,1.52 11.18,1.52 10.92,1.78 10.92,2.54 10.41,3.05 10.41,4.83 10.16,5.08
VBAT on BOTTOM: 7.11,32.51 5.84,32.51 5.08,31.75 5.08,29.21 5.33,28.96 7.62,28.96 7.87,29.21 7.87,31.75
VBAT on POWER SOURCE: 0.76,32.77 8.13,32.77 9.65,31.24 9.65,27.69 6.6,24.64 6.6,18.54 3.56,15.49 3.56,10.92 5.08,9.4 8.89,9.4 9.91,10.41 9.91,12.95 13.49,16.54 15.52,16.51 15.8,16.23 15.8,10.72 11.94,6.86 10.92,6.86 10.41,6.35 10.41,3.05 10.92,2.54 10.92,1.78 11.19,1.51 14.98,1.53 15.24,1.27 15.24,0.51 14.99,0.25 8.38,0.25 5.59,3.05 5.59,5.08 5.08,5.59 1.52,5.59 0.25,6.86 0.25,32.26
VBUS on TOP: 23.47,6.53 22.15,5.21 22.15,4.5 22.45,4.19 24.26,4.19 24.71,4.65 24.71,6.22 24.41,6.53
VBUS on TOP: 15.98,3.23 16.48,3.23 16.89,2.82 18.64,2.82 18.97,2.49 18.97,0.69 18.54,0.25 17.02,0.25 16.64,0.64 16.64,1.93 15.9,2.67 15.9,3.15
VBUS on POWER SOURCE: 16.64,2.51 16.89,2.82 18.11,2.82 20.5,5.21 22.15,5.21 23.44,6.5 24.43,6.5 24.71,6.22 24.71,2.51 22.45,0.25 17.02,0.25 16.64,0.64
VCC_3V on TOP: 2.79,12.7 2.06,11.96 2.06,9.12 2.54,8.64 5.08,8.64 6.1,9.65 6.1,10.92 7.11,11.94 8.38,11.94 9.14,12.7 9.14,14.22 8.38,14.99 6.35,14.99 4.06,12.7
VCC_3V on TOP: 15.06,25.2 15.7,25.2 15.95,24.94 15.95,24 15.7,23.75 15.11,23.75 14.91,23.95 14.91,25.04
